# EAGLE board npix (EAGLE 7.6.0)
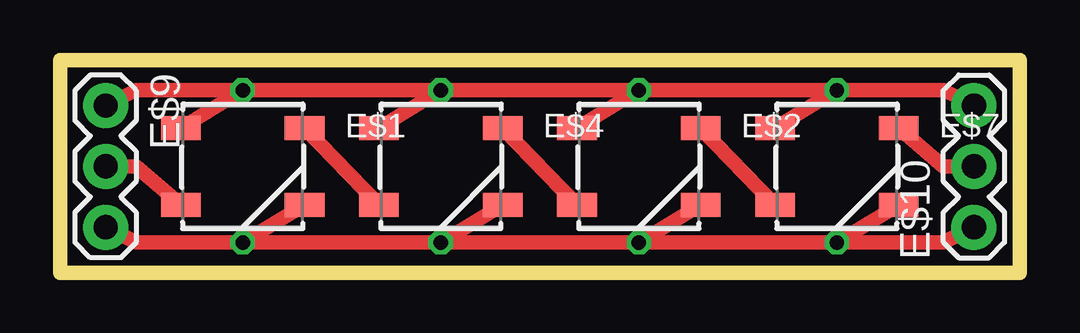
[diagram p0: board, top side]
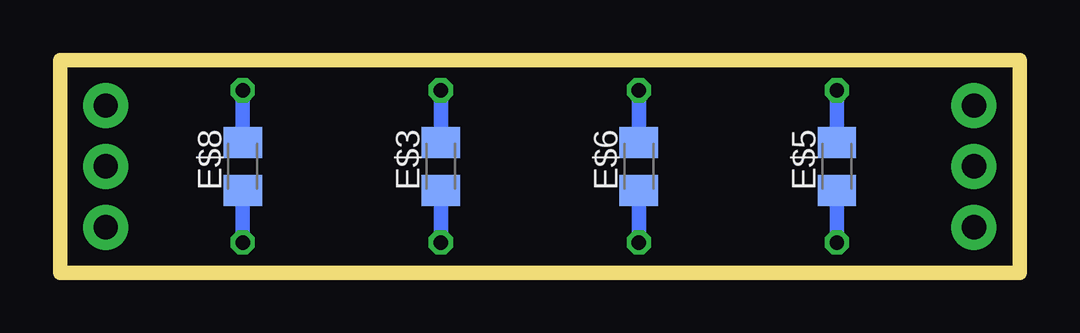
[diagram p1: board, bottom side, seen from below]

Size 40 x 8.89 mm. Coordinates in mm from the lower left corner, seen from the top.
Outline: 0,8.89 40,8.89 40,0 0,0 0,8.89
Copper layers (1*16): Top 0.035mm / dielectric 1.5mm / Bottom 0.035mm
Design rules "default": minimum track width 10mil, minimum drill 24mil, track to track 8mil, track to pad 8mil, pad to pad 8mil, via to via 8mil, smd to smd 8mil, copper to edge 40mil, drill to drill 8mil, minimum pad ring 10mil, minimum via ring 8mil, stop-mask expansion 4mil, vias tented up to drill 0mil, thermal gap 10mil

## Footprints (pad centres in the part's own frame; a part is rotated, then mirrored left to right if it is on the bottom)
WS2812B = smd 1.651 x 1: 1 -2.577,1.6; 2 -2.577,-1.6; 3 2.577,-1.6; 4 2.577,1.6
C0805K = smd 1.3 x 1.6: 1 -1,0; 2 1,0
1X03 = drill 1.016 pad 1.88: 1 0,0; 2 2.54,0; 3 5.08,0

## Placement (x,y rotation side)
E$1  [WS2812B]  7.62,4.45 0 top
E$2  [WS2812B]  24.13,4.45 0 top
E$3  [C0805K]  24.13,4.45 90 bottom
E$4  [WS2812B]  15.88,4.45 0 top
E$5  [C0805K]  7.62,4.45 90 bottom
E$6  [C0805K]  15.88,4.45 90 bottom
E$7  [WS2812B]  32.38,4.45 0 top
E$8  [C0805K]  32.38,4.45 90 bottom
E$9  [1X03]  1.9,6.99 270 top
E$10  [1X03]  38.1,1.91 90 top

## Library data of the parts
E$1 E$2 E$4 E$7 = SparkFun-LED
E$3 E$5 E$6 E$8 = rcl
E$9 E$10 = SparkFun-Connectors

## Nets
S$1: E$1.1 E$2.1 E$3.2 E$4.1 E$5.2 E$6.2 E$7.1 E$8.2 E$9.1 E$10.3
S$2: E$1.3 E$2.3 E$3.1 E$4.3 E$5.1 E$6.1 E$7.3 E$8.1 E$9.3 E$10.1
S$3: E$7.4 E$10.2
S$5: E$2.4 E$7.2
S$6: E$2.2 E$4.4
S$7: E$1.2 E$9.2
S$9: E$1.4 E$4.2

## Tracks (layer width: path | path; a pad name or v marks a point on that pad's centre or on a via)
S$1  (via drill 0.6)
  Top 0.61: v7.62,7.62 v15.88,7.62 | E$2.1 v24.13,7.62 | v24.13,7.62 v32.38,7.62 | E$4.1 v15.88,7.62 | v15.88,7.62 v24.13,7.62 | E$7.1 v32.38,7.62 | v32.38,7.62 36.83,7.62 E$10.3 | E$1.1 v7.62,7.62 | v7.62,7.62 3.17,7.62 E$9.1
  Bottom 0.61: v7.62,7.62 E$5.2 | v15.88,7.62 E$6.2 | v24.13,7.62 E$3.2 | v32.38,7.62 E$8.2
S$2  (via drill 0.6)
  Top 0.61: v15.88,1.27 v7.62,1.27 | v24.13,1.27 E$2.3 | v32.38,1.27 v24.13,1.27 | E$4.3 v15.88,1.27 | v15.88,1.27 v24.13,1.27 | E$1.3 v7.62,1.27 | v7.62,1.27 3.17,1.27 E$9.3 | E$7.3 v32.38,1.27 | v32.38,1.27 36.83,1.27 E$10.1
  Bottom 0.61: E$5.1 v7.62,1.27 | E$6.1 v15.88,1.27 | E$3.1 v24.13,1.27 | E$8.1 v32.38,1.27
S$3
  Top 0.61: E$7.4 36.83,4.45 E$10.2
S$5
  Top 0.61: E$2.4 E$7.2
S$6
  Top 0.61: E$4.4 E$2.2
S$7
  Top 0.61: E$1.2 3.17,4.45 E$9.2
S$9
  Top 0.61: E$1.4 E$4.2